# EAGLE board Qwiic-OpenLog-Panel (EAGLE 9.3.2), part 1 of 2
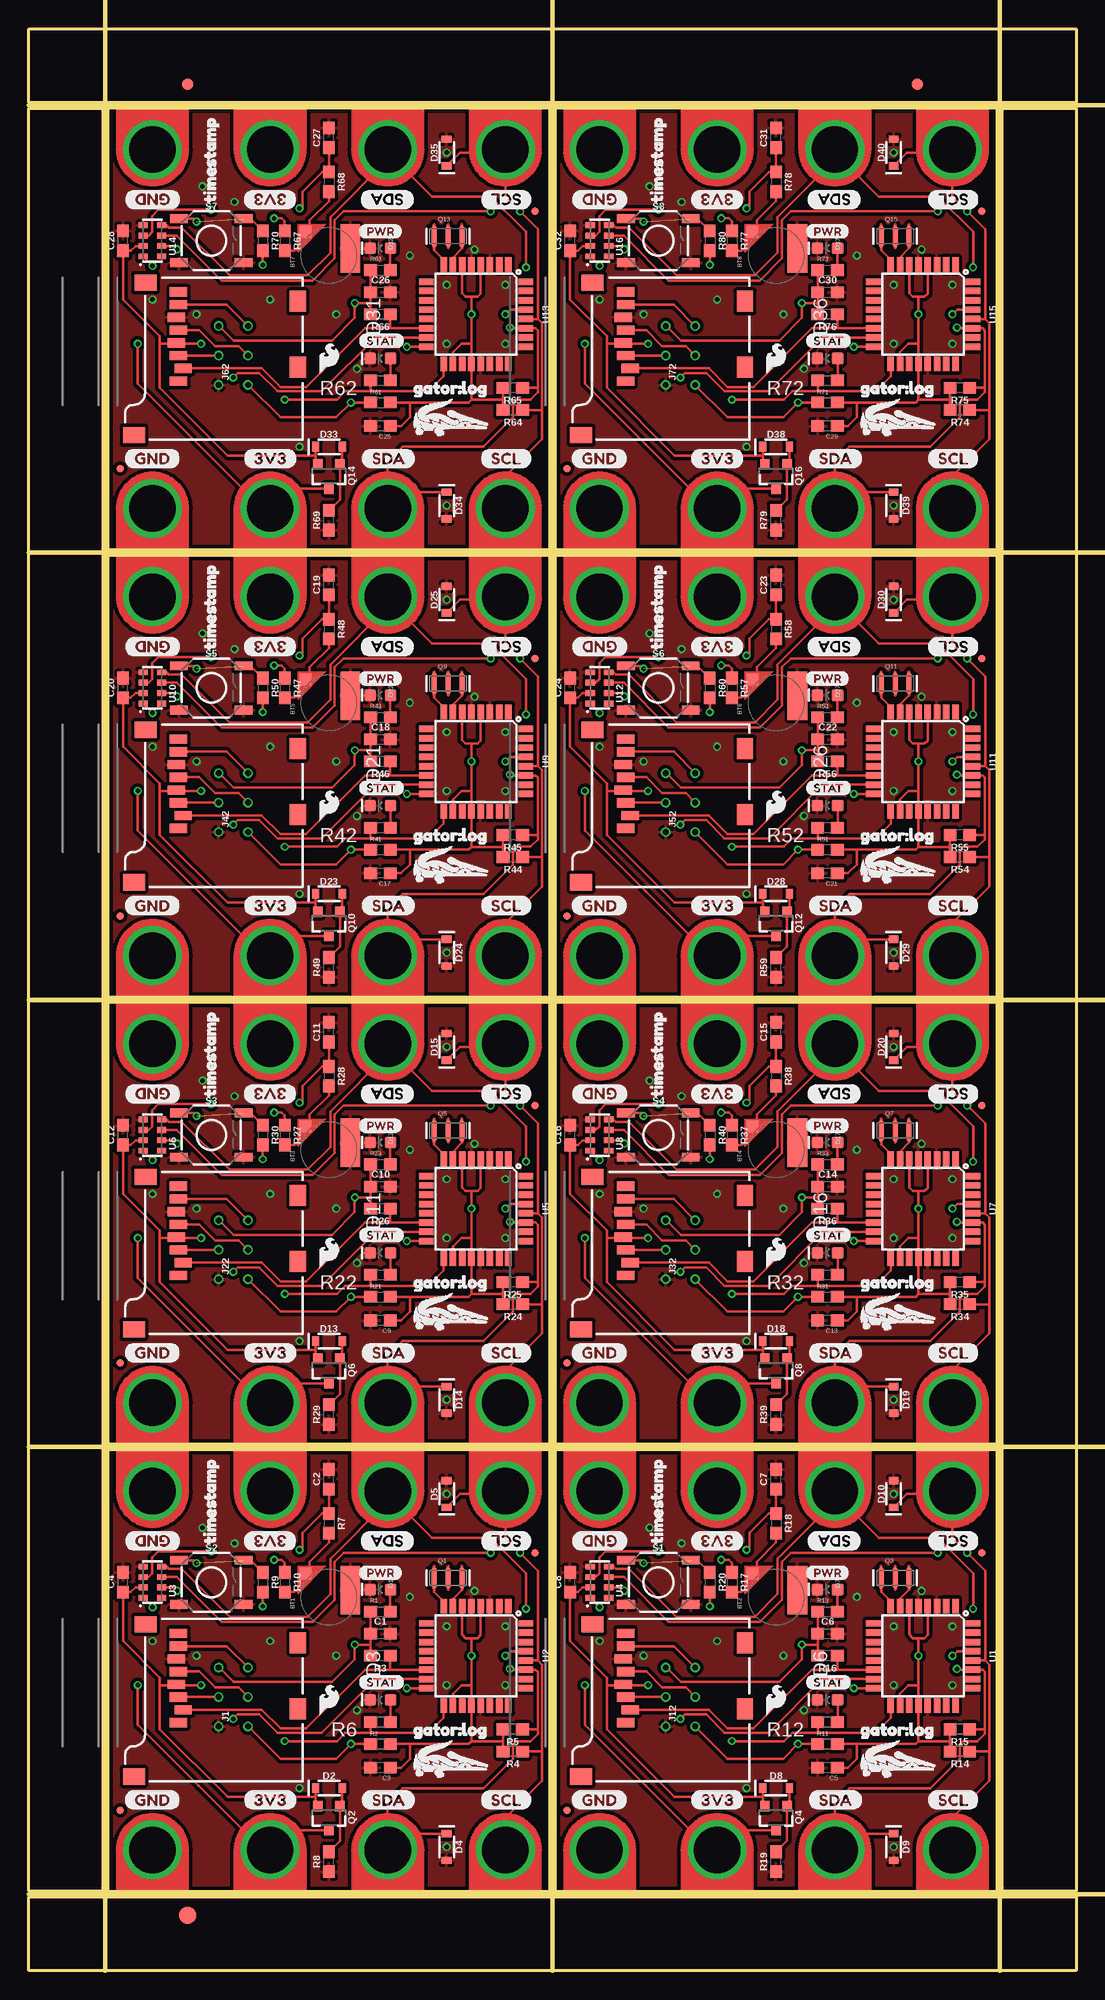
[diagram p0: board, top side]
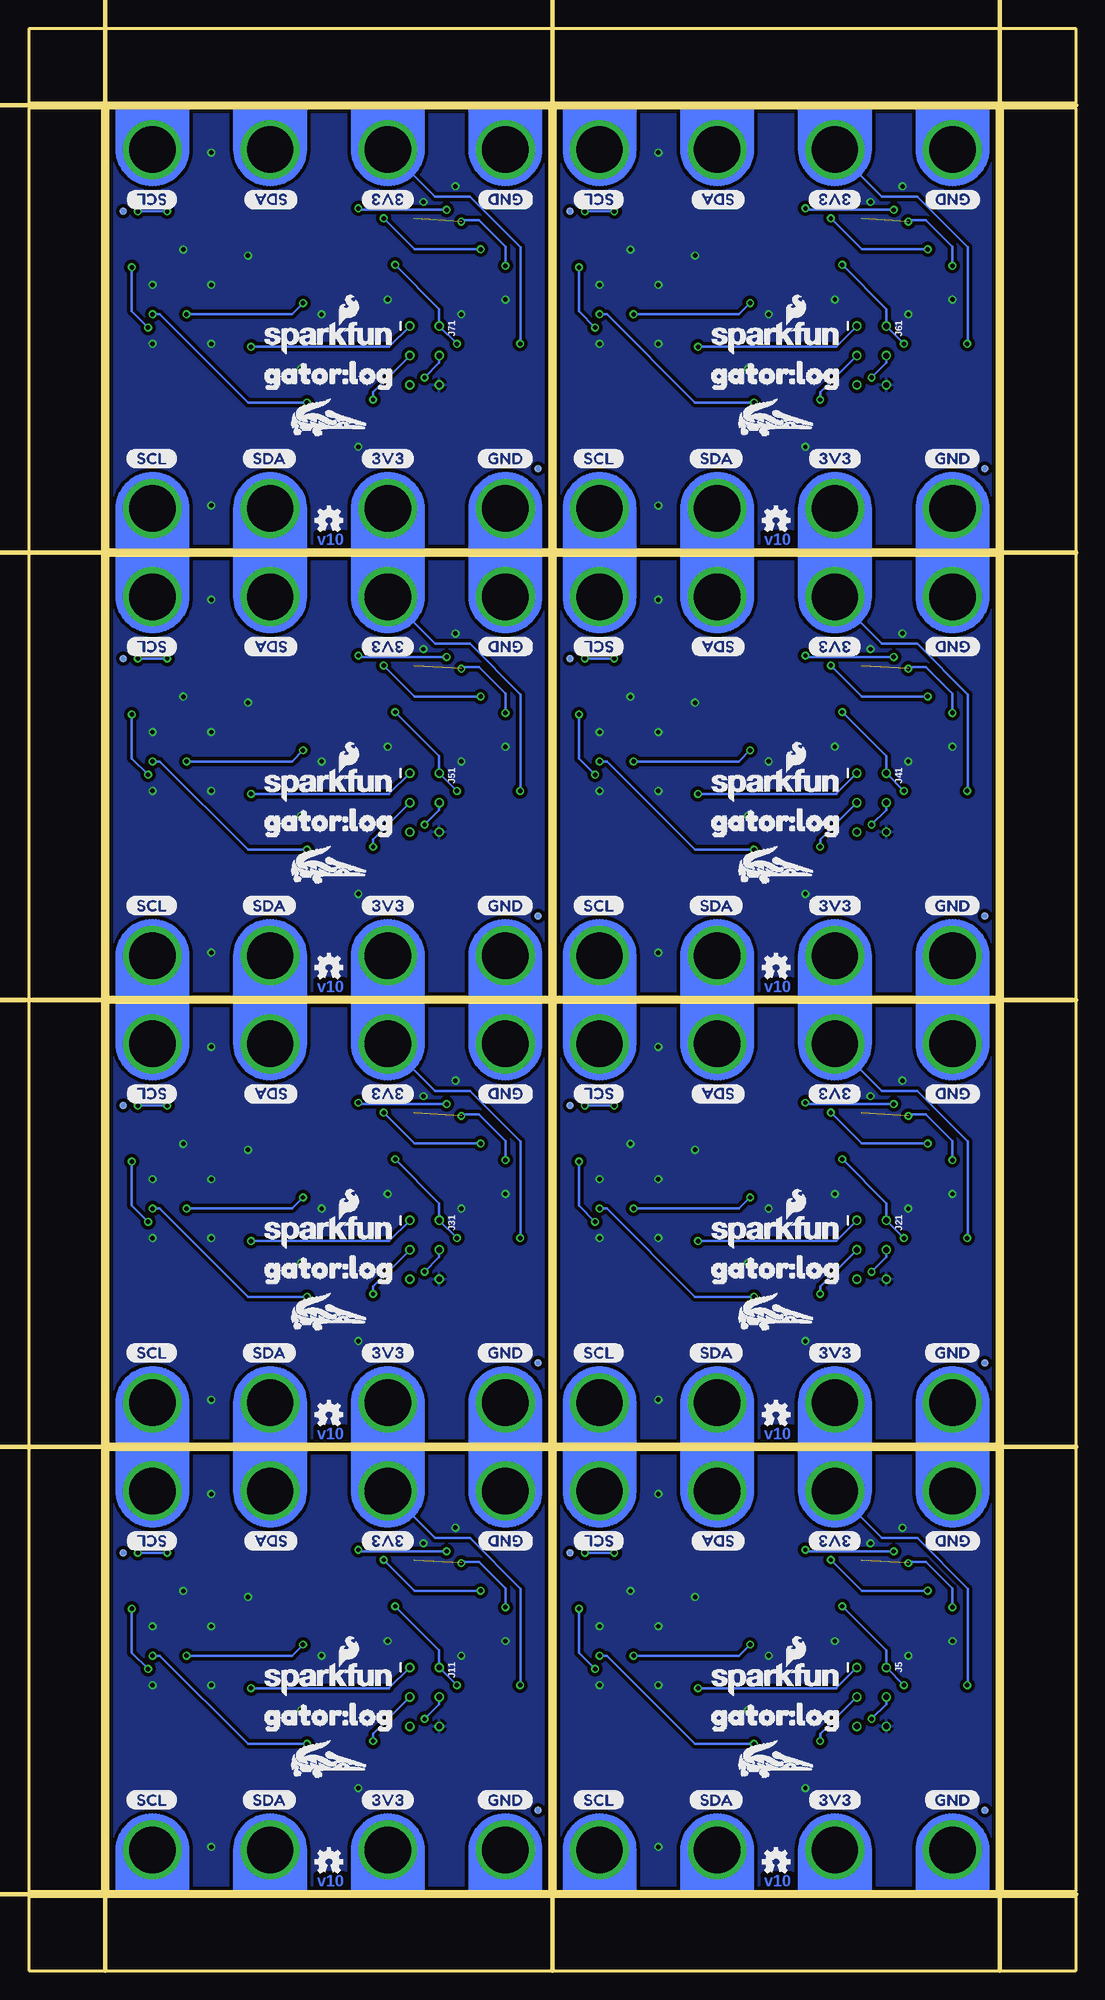
[diagram p1: board, bottom side, seen from below]

Size 90.42 x 167.64 mm. Coordinates in mm from the lower left corner, seen from the top.
Outline: 44.96,6.86 44.96,44.96 6.86,44.96 6.86,6.86 44.96,6.86
Outline: 83.57,6.86 83.57,44.96 45.47,44.96 45.47,6.86 83.57,6.86
Outline: 44.96,45.47 44.96,83.57 6.86,83.57 6.86,45.47 44.96,45.47
Outline: 83.57,45.47 83.57,83.57 45.47,83.57 45.47,45.47 83.57,45.47
Outline: 44.96,84.07 44.96,122.17 6.86,122.17 6.86,84.07 44.96,84.07
Outline: 83.57,84.07 83.57,122.17 45.47,122.17 45.47,84.07 83.57,84.07
Outline: 44.96,122.68 44.96,160.78 6.86,160.78 6.86,122.68 44.96,122.68
Outline: 83.57,122.68 83.57,160.78 45.47,160.78 45.47,122.68 83.57,122.68
Outline: 0,6.35 90.42,6.35 90.42,0 0,0 0,6.35
Outline: 84.07,160.78 90.42,160.78 90.42,6.86 84.07,6.86 84.07,160.78
Outline: 0,167.64 90.42,167.64 90.42,161.29 0,161.29 0,167.64
Outline: 0,160.78 6.35,160.78 6.35,6.86 0,6.86 0,160.78
Copper layers (1*16): Top 0.035mm / dielectric 1.5mm / Bottom 0.035mm
Design rules "SparkFun-2-layer-PCBWay-LIMIT": minimum track width 6mil, minimum drill 0.3mm, track to track 6mil, track to pad 6mil, pad to pad 6mil, via to via 6mil, smd to smd 6mil, copper to edge 6mil, drill to drill 6mil, minimum pad ring 6mil, minimum via ring 6mil, stop-mask expansion 4mil, vias tented up to drill 25mil, thermal gap 10mil
Net classes: 1 vcc: width 0.152 mm
Milling: 8 lines

## Footprints (pad centres in the part's own frame; a part is rotated, then mirrored left to right if it is on the bottom)
ML414H_IV01E = smd 1 x 1: + 2.022,2.032 | smd 4.2 x 1.7: - 0.6,-1.85
0603 = smd 1.1 x 1: 1 -0.85,0; 2 0.85,0
LED-0603 = smd 1 x 1: A -0.877,0; C 0.877,0
SOD-323 = smd 0.63 x 0.83: A 1.15,0; C -1.15,0
FIDUCIAL-1X2 = smd 1 x 1: 1 0,0
FIDUCIAL-1.5X3 = smd 1.5 x 1.5: 1 0,0
FIDUCIAL-MICRO = smd 0.635 x 0.635: 1 0,0
MICRO-SD-SOCKET = smd 1.8 x 1.4: CD1 -2.05,0.4; CD2 -7.75,0.4 | smd 0.8 x 1.5: CS -7.84,10.3; DI -6.74,10.7; DO -2.34,10.7; GND -3.44,10.9; RSV1 -8.94,10.7; RSV2 -1.24,10.7; SCLK -4.54,10.7; VCC -5.64,10.9 | smd 1.4 x 1.9: GND1 -13.6,14.55; GND3 -0.45,13.55
GATOR_MINI = drill 4 pad 5.08: P$2 0,-0.254
2X3_TEST_POINTS = drill 0.508: 1 -2.54,-1.27; 2 -2.54,1.27; 3 0,-1.27; 4 0,1.27; 5 2.54,-1.27; 6 2.54,1.27
RESONATOR-SMD = smd 0.45 x 1.905: 1 -1.2,0; 2 0,0; 3 1.2,0
SOT23-3 = smd 0.8 x 0.9: 1 -0.95,-1; 2 0.95,-1; 3 0,1.1
TACTILE_SWITCH_SMD_5.2MM = smd 1.524 x 0.762: 1 -2.794,1.905; 2 2.794,1.905; 3 -2.794,-1.905; 4 2.794,-1.905
TQFP32-08 = smd 1.27 x 0.559: 1 -4.293,2.8; 2 -4.293,2; 3 -4.293,1.2; 4 -4.293,0.4; 5 -4.293,-0.4; 6 -4.293,-1.2; 7 -4.293,-2; 8 -4.293,-2.8; 17 4.293,-2.8; 18 4.293,-2; 19 4.293,-1.2; 20 4.293,-0.4; 21 4.293,0.4; 22 4.293,1.2; 23 4.293,2; 24 4.293,2.8 | smd 0.559 x 1.27: 9 -2.8,-4.293; 10 -2,-4.293; 11 -1.2,-4.293; 12 -0.4,-4.293; 13 0.4,-4.293; 14 1.2,-4.293; 15 2,-4.293; 16 2.8,-4.293; 25 2.8,4.293; 26 2,4.293; 27 1.2,4.293; 28 0.4,4.293; 29 -0.4,4.293; 30 -1.2,4.293; 31 -2,4.293; 32 -2.8,4.293
RV-3028 = smd 0.5 x 0.8: 1 -1.35,-0.8; 2 -0.45,-0.8; 3 0.45,-0.8; 4 1.35,-0.8; 5 1.35,0.8; 6 0.45,0.8; 7 -0.45,0.8; 8 -1.35,0.8

## Placement (x,y rotation side)
BT1  ML414H_IV01E_BATTERY  [ML414H_IV01E]  25.91,32.26 90 top
BT2  ML414H_IV01E_BATTERY  [ML414H_IV01E]  64.52,32.26 90 top
BT3  ML414H_IV01E_BATTERY  [ML414H_IV01E]  25.91,70.87 90 top
BT4  ML414H_IV01E_BATTERY  [ML414H_IV01E]  64.52,70.87 90 top
BT5  ML414H_IV01E_BATTERY  [ML414H_IV01E]  25.91,109.47 90 top
BT6  ML414H_IV01E_BATTERY  [ML414H_IV01E]  64.52,109.47 90 top
BT7  ML414H_IV01E_BATTERY  [ML414H_IV01E]  25.91,148.08 90 top
BT8  ML414H_IV01E_BATTERY  [ML414H_IV01E]  64.52,148.08 90 top
C1  4.7uF  [0603]  30.35,29.08 0 top
C2  0.1uF  [0603]  25.91,42.42 90 top
C3  0.1uF  [0603]  30.35,17.53 180 top
C4  0.1uF  [0603]  8.13,33.53 90 top
C5  0.1uF  [0603]  68.96,17.53 180 top
C6  4.7uF  [0603]  68.96,29.08 0 top
C7  0.1uF  [0603]  64.52,42.42 90 top
C8  0.1uF  [0603]  46.74,33.53 90 top
C9  0.1uF  [0603]  30.35,56.13 180 top
C10  4.7uF  [0603]  30.35,67.69 0 top
C11  0.1uF  [0603]  25.91,81.03 90 top
C12  0.1uF  [0603]  8.13,72.14 90 top
C13  0.1uF  [0603]  68.96,56.13 180 top
C14  4.7uF  [0603]  68.96,67.69 0 top
C15  0.1uF  [0603]  64.52,81.03 90 top
C16  0.1uF  [0603]  46.74,72.14 90 top
C17  0.1uF  [0603]  30.35,94.74 180 top
C18  4.7uF  [0603]  30.35,106.3 0 top
C19  0.1uF  [0603]  25.91,119.63 90 top
C20  0.1uF  [0603]  8.13,110.74 90 top
C21  0.1uF  [0603]  68.96,94.74 180 top
C22  4.7uF  [0603]  68.96,106.3 0 top
C23  0.1uF  [0603]  64.52,119.63 90 top
C24  0.1uF  [0603]  46.74,110.74 90 top
C25  0.1uF  [0603]  30.35,133.35 180 top
C26  4.7uF  [0603]  30.35,144.91 0 top
C27  0.1uF  [0603]  25.91,158.24 90 top
C28  0.1uF  [0603]  8.13,149.35 90 top
C29  0.1uF  [0603]  68.96,133.35 180 top
C30  4.7uF  [0603]  68.96,144.91 0 top
C31  0.1uF  [0603]  64.52,158.24 90 top
C32  0.1uF  [0603]  46.74,149.35 90 top
D1  RED  [LED-0603]  30.35,32.89 180 top
D2  3.6V  [SOD-323]  25.91,15.75 0 top
D3  GREEN  [LED-0603]  30.35,23.37 180 top
D4  3.6V  [SOD-323]  36.07,10.67 270 top
D5  3.6V  [SOD-323]  36.07,41.15 90 top
D6  GREEN  [LED-0603]  68.96,23.37 180 top
D7  RED  [LED-0603]  68.96,32.89 180 top
D8  3.6V  [SOD-323]  64.52,15.75 0 top
D9  3.6V  [SOD-323]  74.68,10.67 270 top
D10  3.6V  [SOD-323]  74.68,41.15 90 top
D11  GREEN  [LED-0603]  30.35,61.98 180 top
D12  RED  [LED-0603]  30.35,71.5 180 top
D13  3.6V  [SOD-323]  25.91,54.36 0 top
D14  3.6V  [SOD-323]  36.07,49.28 270 top
D15  3.6V  [SOD-323]  36.07,79.76 90 top
D16  GREEN  [LED-0603]  68.96,61.98 180 top
D17  RED  [LED-0603]  68.96,71.5 180 top
D18  3.6V  [SOD-323]  64.52,54.36 0 top
D19  3.6V  [SOD-323]  74.68,49.28 270 top
D20  3.6V  [SOD-323]  74.68,79.76 90 top
D21  GREEN  [LED-0603]  30.35,100.58 180 top
D22  RED  [LED-0603]  30.35,110.11 180 top
D23  3.6V  [SOD-323]  25.91,92.96 0 top
D24  3.6V  [SOD-323]  36.07,87.88 270 top
D25  3.6V  [SOD-323]  36.07,118.36 90 top
D26  GREEN  [LED-0603]  68.96,100.58 180 top
D27  RED  [LED-0603]  68.96,110.11 180 top
D28  3.6V  [SOD-323]  64.52,92.96 0 top
D29  3.6V  [SOD-323]  74.68,87.88 270 top
D30  3.6V  [SOD-323]  74.68,118.36 90 top
D31  GREEN  [LED-0603]  30.35,139.19 180 top
D32  RED  [LED-0603]  30.35,148.72 180 top
D33  3.6V  [SOD-323]  25.91,131.57 0 top
D34  3.6V  [SOD-323]  36.07,126.49 270 top
D35  3.6V  [SOD-323]  36.07,156.97 90 top
D36  GREEN  [LED-0603]  68.96,139.19 180 top
D37  RED  [LED-0603]  68.96,148.72 180 top
D38  3.6V  [SOD-323]  64.52,131.57 0 top
D39  3.6V  [SOD-323]  74.68,126.49 270 top
D40  3.6V  [SOD-323]  74.68,156.97 90 top
E$1  [FIDUCIAL-1X2]  13.72,162.88 0 top
E$2  [FIDUCIAL-1X2]  76.71,162.88 0 top
E$3  [FIDUCIAL-1.5X3]  13.72,4.76 0 top
FID1  FIDUCIALUFIDUCIAL  [FIDUCIAL-MICRO]  43.69,36.07 0 top
FID2  FIDUCIALUFIDUCIAL  [FIDUCIAL-MICRO]  7.87,13.84 0 top
FID3  FIDUCIALUFIDUCIAL  [FIDUCIAL-MICRO]  7.87,13.84 180 bottom
FID4  FIDUCIALUFIDUCIAL  [FIDUCIAL-MICRO]  43.69,36.07 0 bottom
FID5  FIDUCIALUFIDUCIAL  [FIDUCIAL-MICRO]  82.3,36.07 0 top
FID6  FIDUCIALUFIDUCIAL  [FIDUCIAL-MICRO]  46.48,13.84 0 top
FID7  FIDUCIALUFIDUCIAL  [FIDUCIAL-MICRO]  46.48,13.84 180 bottom
FID8  FIDUCIALUFIDUCIAL  [FIDUCIAL-MICRO]  82.3,36.07 0 bottom
FID9  FIDUCIALUFIDUCIAL  [FIDUCIAL-MICRO]  43.69,74.68 0 top
FID10  FIDUCIALUFIDUCIAL  [FIDUCIAL-MICRO]  7.87,52.45 0 top
FID11  FIDUCIALUFIDUCIAL  [FIDUCIAL-MICRO]  7.87,52.45 180 bottom
FID12  FIDUCIALUFIDUCIAL  [FIDUCIAL-MICRO]  43.69,74.68 0 bottom
FID13  FIDUCIALUFIDUCIAL  [FIDUCIAL-MICRO]  82.3,74.68 0 top
FID14  FIDUCIALUFIDUCIAL  [FIDUCIAL-MICRO]  46.48,52.45 0 top
FID15  FIDUCIALUFIDUCIAL  [FIDUCIAL-MICRO]  46.48,52.45 180 bottom
FID16  FIDUCIALUFIDUCIAL  [FIDUCIAL-MICRO]  82.3,74.68 0 bottom
FID17  FIDUCIALUFIDUCIAL  [FIDUCIAL-MICRO]  43.69,113.28 0 top
FID18  FIDUCIALUFIDUCIAL  [FIDUCIAL-MICRO]  7.87,91.06 0 top
FID19  FIDUCIALUFIDUCIAL  [FIDUCIAL-MICRO]  7.87,91.06 180 bottom
FID20  FIDUCIALUFIDUCIAL  [FIDUCIAL-MICRO]  43.69,113.28 0 bottom
FID21  FIDUCIALUFIDUCIAL  [FIDUCIAL-MICRO]  82.3,113.28 0 top
FID22  FIDUCIALUFIDUCIAL  [FIDUCIAL-MICRO]  46.48,91.06 0 top
FID23  FIDUCIALUFIDUCIAL  [FIDUCIAL-MICRO]  46.48,91.06 180 bottom
FID24  FIDUCIALUFIDUCIAL  [FIDUCIAL-MICRO]  82.3,113.28 0 bottom
FID25  FIDUCIALUFIDUCIAL  [FIDUCIAL-MICRO]  43.69,151.89 0 top
FID26  FIDUCIALUFIDUCIAL  [FIDUCIAL-MICRO]  7.87,129.67 0 top
FID27  FIDUCIALUFIDUCIAL  [FIDUCIAL-MICRO]  7.87,129.67 180 bottom
FID28  FIDUCIALUFIDUCIAL  [FIDUCIAL-MICRO]  43.69,151.89 0 bottom
FID29  FIDUCIALUFIDUCIAL  [FIDUCIAL-MICRO]  82.3,151.89 0 top
FID30  FIDUCIALUFIDUCIAL  [FIDUCIAL-MICRO]  46.48,129.67 0 top
FID31  FIDUCIALUFIDUCIAL  [FIDUCIAL-MICRO]  46.48,129.67 180 bottom
FID32  FIDUCIALUFIDUCIAL  [FIDUCIAL-MICRO]  82.3,151.89 0 bottom
J1  MICRO-SD  [MICRO-SD-SOCKET]  23.62,30.35 90 top
J2  GATORGATOR_MINI  [GATOR_MINI]  41.15,41.15 180 top
J3  GATORGATOR_MINI  [GATOR_MINI]  30.99,41.15 180 top
J4  GATORGATOR_MINI  [GATOR_MINI]  20.83,41.15 180 top
J5  ISP  [2X3_TEST_POINTS]  17.65,23.62 270 bottom
J6  GATORGATOR_MINI  [GATOR_MINI]  10.67,41.15 180 top
J7  GATORGATOR_MINI  [GATOR_MINI]  41.15,10.67 0 top
J8  GATORGATOR_MINI  [GATOR_MINI]  30.99,10.67 0 top
J9  GATORGATOR_MINI  [GATOR_MINI]  20.83,10.67 0 top
J10  GATORGATOR_MINI  [GATOR_MINI]  10.67,10.67 0 top
J11  ISP  [2X3_TEST_POINTS]  56.26,23.62 270 bottom
J12  MICRO-SD  [MICRO-SD-SOCKET]  62.23,30.35 90 top
J13  GATORGATOR_MINI  [GATOR_MINI]  79.76,10.67 0 top
J14  GATORGATOR_MINI  [GATOR_MINI]  69.6,10.67 0 top
J15  GATORGATOR_MINI  [GATOR_MINI]  59.44,10.67 0 top
J16  GATORGATOR_MINI  [GATOR_MINI]  49.28,10.67 0 top
J17  GATORGATOR_MINI  [GATOR_MINI]  79.76,41.15 180 top
J18  GATORGATOR_MINI  [GATOR_MINI]  69.6,41.15 180 top
J19  GATORGATOR_MINI  [GATOR_MINI]  59.44,41.15 180 top
J20  GATORGATOR_MINI  [GATOR_MINI]  49.28,41.15 180 top
J21  ISP  [2X3_TEST_POINTS]  17.65,62.23 270 bottom
J22  MICRO-SD  [MICRO-SD-SOCKET]  23.62,68.96 90 top
J23  GATORGATOR_MINI  [GATOR_MINI]  41.15,49.28 0 top
J24  GATORGATOR_MINI  [GATOR_MINI]  30.99,49.28 0 top
J25  GATORGATOR_MINI  [GATOR_MINI]  20.83,49.28 0 top
J26  GATORGATOR_MINI  [GATOR_MINI]  10.67,49.28 0 top
J27  GATORGATOR_MINI  [GATOR_MINI]  41.15,79.76 180 top
J28  GATORGATOR_MINI  [GATOR_MINI]  30.99,79.76 180 top
J29  GATORGATOR_MINI  [GATOR_MINI]  20.83,79.76 180 top
J30  GATORGATOR_MINI  [GATOR_MINI]  10.67,79.76 180 top
J31  ISP  [2X3_TEST_POINTS]  56.26,62.23 270 bottom
J32  MICRO-SD  [MICRO-SD-SOCKET]  62.23,68.96 90 top
J33  GATORGATOR_MINI  [GATOR_MINI]  79.76,49.28 0 top
J34  GATORGATOR_MINI  [GATOR_MINI]  69.6,49.28 0 top
J35  GATORGATOR_MINI  [GATOR_MINI]  59.44,49.28 0 top
J36  GATORGATOR_MINI  [GATOR_MINI]  49.28,49.28 0 top
J37  GATORGATOR_MINI  [GATOR_MINI]  79.76,79.76 180 top
J38  GATORGATOR_MINI  [GATOR_MINI]  69.6,79.76 180 top
J39  GATORGATOR_MINI  [GATOR_MINI]  59.44,79.76 180 top
J40  GATORGATOR_MINI  [GATOR_MINI]  49.28,79.76 180 top
J41  ISP  [2X3_TEST_POINTS]  17.65,100.84 270 bottom
J42  MICRO-SD  [MICRO-SD-SOCKET]  23.62,107.57 90 top
J43  GATORGATOR_MINI  [GATOR_MINI]  41.15,87.88 0 top
J44  GATORGATOR_MINI  [GATOR_MINI]  30.99,87.88 0 top
J45  GATORGATOR_MINI  [GATOR_MINI]  20.83,87.88 0 top
J46  GATORGATOR_MINI  [GATOR_MINI]  10.67,87.88 0 top
J47  GATORGATOR_MINI  [GATOR_MINI]  41.15,118.36 180 top
J48  GATORGATOR_MINI  [GATOR_MINI]  30.99,118.36 180 top
J49  GATORGATOR_MINI  [GATOR_MINI]  20.83,118.36 180 top
J50  GATORGATOR_MINI  [GATOR_MINI]  10.67,118.36 180 top
J51  ISP  [2X3_TEST_POINTS]  56.26,100.84 270 bottom
J52  MICRO-SD  [MICRO-SD-SOCKET]  62.23,107.57 90 top
J53  GATORGATOR_MINI  [GATOR_MINI]  79.76,87.88 0 top
J54  GATORGATOR_MINI  [GATOR_MINI]  69.6,87.88 0 top
J55  GATORGATOR_MINI  [GATOR_MINI]  59.44,87.88 0 top
J56  GATORGATOR_MINI  [GATOR_MINI]  49.28,87.88 0 top
J57  GATORGATOR_MINI  [GATOR_MINI]  79.76,118.36 180 top
J58  GATORGATOR_MINI  [GATOR_MINI]  69.6,118.36 180 top
J59  GATORGATOR_MINI  [GATOR_MINI]  59.44,118.36 180 top
J60  GATORGATOR_MINI  [GATOR_MINI]  49.28,118.36 180 top
J61  ISP  [2X3_TEST_POINTS]  17.65,139.45 270 bottom
J62  MICRO-SD  [MICRO-SD-SOCKET]  23.62,146.18 90 top
J63  GATORGATOR_MINI  [GATOR_MINI]  41.15,126.49 0 top
J64  GATORGATOR_MINI  [GATOR_MINI]  30.99,126.49 0 top
J65  GATORGATOR_MINI  [GATOR_MINI]  20.83,126.49 0 top
J66  GATORGATOR_MINI  [GATOR_MINI]  10.67,126.49 0 top
J67  GATORGATOR_MINI  [GATOR_MINI]  41.15,156.97 180 top
J68  GATORGATOR_MINI  [GATOR_MINI]  30.99,156.97 180 top
J69  GATORGATOR_MINI  [GATOR_MINI]  20.83,156.97 180 top
J70  GATORGATOR_MINI  [GATOR_MINI]  10.67,156.97 180 top
J71  ISP  [2X3_TEST_POINTS]  56.26,139.45 270 bottom
J72  MICRO-SD  [MICRO-SD-SOCKET]  62.23,146.18 90 top
J73  GATORGATOR_MINI  [GATOR_MINI]  79.76,126.49 0 top
J74  GATORGATOR_MINI  [GATOR_MINI]  69.6,126.49 0 top
J75  GATORGATOR_MINI  [GATOR_MINI]  59.44,126.49 0 top
J76  GATORGATOR_MINI  [GATOR_MINI]  49.28,126.49 0 top
J77  GATORGATOR_MINI  [GATOR_MINI]  79.76,156.97 180 top
J78  GATORGATOR_MINI  [GATOR_MINI]  69.6,156.97 180 top
J79  GATORGATOR_MINI  [GATOR_MINI]  59.44,156.97 180 top
J80  GATORGATOR_MINI  [GATOR_MINI]  49.28,156.97 180 top
LOGO1  SFE_LOGO_FLAME.1_INCH  [SFE_LOGO_FLAME_.1]  25.91,23.37 0 top
LOGO2  OSHW-LOGOMINI  [OSHW-LOGO-MINI]  25.91,9.4 0 bottom
LOGO3  OSHW-LOGOMINI  [OSHW-LOGO-MINI]  64.52,9.4 0 bottom
LOGO4  SFE_LOGO_NAME_FLAME.1_INCH  [SFE_LOGO_NAME_FLAME_.1]  25.91,25.15 0 bottom
LOGO5  SFE_LOGO_NAME_FLAME.1_INCH  [SFE_LOGO_NAME_FLAME_.1]  64.52,25.15 0 bottom
LOGO6  SFE_LOGO_FLAME.1_INCH  [SFE_LOGO_FLAME_.1]  64.52,23.37 0 top
LOGO7  OSHW-LOGOMINI  [OSHW-LOGO-MINI]  25.91,48.01 0 bottom
LOGO8  SFE_LOGO_NAME_FLAME.1_INCH  [SFE_LOGO_NAME_FLAME_.1]  25.91,63.75 0 bottom
LOGO9  SFE_LOGO_FLAME.1_INCH  [SFE_LOGO_FLAME_.1]  25.91,61.98 0 top
LOGO10  OSHW-LOGOMINI  [OSHW-LOGO-MINI]  64.52,48.01 0 bottom
LOGO11  SFE_LOGO_NAME_FLAME.1_INCH  [SFE_LOGO_NAME_FLAME_.1]  64.52,63.75 0 bottom
LOGO12  SFE_LOGO_FLAME.1_INCH  [SFE_LOGO_FLAME_.1]  64.52,61.98 0 top
LOGO13  OSHW-LOGOMINI  [OSHW-LOGO-MINI]  25.91,86.61 0 bottom
LOGO14  SFE_LOGO_NAME_FLAME.1_INCH  [SFE_LOGO_NAME_FLAME_.1]  25.91,102.36 0 bottom
LOGO15  SFE_LOGO_FLAME.1_INCH  [SFE_LOGO_FLAME_.1]  25.91,100.58 0 top
LOGO16  OSHW-LOGOMINI  [OSHW-LOGO-MINI]  64.52,86.61 0 bottom
LOGO17  SFE_LOGO_NAME_FLAME.1_INCH  [SFE_LOGO_NAME_FLAME_.1]  64.52,102.36 0 bottom
LOGO18  SFE_LOGO_FLAME.1_INCH  [SFE_LOGO_FLAME_.1]  64.52,100.58 0 top
LOGO19  OSHW-LOGOMINI  [OSHW-LOGO-MINI]  25.91,125.22 0 bottom
LOGO20  SFE_LOGO_NAME_FLAME.1_INCH  [SFE_LOGO_NAME_FLAME_.1]  25.91,140.97 0 bottom
LOGO21  SFE_LOGO_FLAME.1_INCH  [SFE_LOGO_FLAME_.1]  25.91,139.19 0 top
LOGO22  OSHW-LOGOMINI  [OSHW-LOGO-MINI]  64.52,125.22 0 bottom
LOGO23  SFE_LOGO_NAME_FLAME.1_INCH  [SFE_LOGO_NAME_FLAME_.1]  64.52,140.97 0 bottom
LOGO24  SFE_LOGO_FLAME.1_INCH  [SFE_LOGO_FLAME_.1]  64.52,139.19 0 top
Q1  16MHZ  [RESONATOR-SMD]  36.2,33.91 0 top
Q2  2.5A/30V/105mΩ  [SOT23-3]  25.91,13.21 180 top
Q3  16MHZ  [RESONATOR-SMD]  74.8,33.91 0 top
Q4  2.5A/30V/105mΩ  [SOT23-3]  64.52,13.21 180 top
Q5  16MHZ  [RESONATOR-SMD]  36.2,72.52 0 top
Q6  2.5A/30V/105mΩ  [SOT23-3]  25.91,51.82 180 top
Q7  16MHZ  [RESONATOR-SMD]  74.8,72.52 0 top
Q8  2.5A/30V/105mΩ  [SOT23-3]  64.52,51.82 180 top
Q9  16MHZ  [RESONATOR-SMD]  36.2,111.12 0 top
Q10  2.5A/30V/105mΩ  [SOT23-3]  25.91,90.42 180 top
Q11  16MHZ  [RESONATOR-SMD]  74.8,111.12 0 top
Q12  2.5A/30V/105mΩ  [SOT23-3]  64.52,90.42 180 top
Q13  16MHZ  [RESONATOR-SMD]  36.2,149.73 0 top
Q14  2.5A/30V/105mΩ  [SOT23-3]  25.91,129.03 180 top
Q15  16MHZ  [RESONATOR-SMD]  74.8,149.73 0 top
Q16  2.5A/30V/105mΩ  [SOT23-3]  64.52,129.03 180 top
R1  1k  [0603]  30.35,30.99 0 top
R2  10k  [0603]  30.35,19.56 0 top
R3  10k  [0603]  30.35,27.18 180 top
R4  10k  [0603]  41.78,18.92 180 top
R5  10k  [0603]  41.78,20.83 180 top
R6  330  [0603]  30.35,21.46 0 top
R7  470  [0603]  25.91,38.61 270 top
R8  10k  [0603]  25.91,9.4 90 top
R9  10k  [0603]  20.19,33.53 270 top
R10  10k  [0603]  22.1,33.53 270 top
R11  10k  [0603]  68.96,19.56 0 top
R12  330  [0603]  68.96,21.46 0 top
R13  1k  [0603]  68.96,30.99 0 top
R14  10k  [0603]  80.39,18.92 180 top
R15  10k  [0603]  80.39,20.83 180 top
R16  10k  [0603]  68.96,27.18 180 top
R17  10k  [0603]  60.71,33.53 270 top
R18  470  [0603]  64.52,38.61 270 top
R19  10k  [0603]  64.52,9.4 90 top
R20  10k  [0603]  58.8,33.53 270 top
R21  10k  [0603]  30.35,58.17 0 top
R22  330  [0603]  30.35,60.07 0 top
R23  1k  [0603]  30.35,69.6 0 top
R24  10k  [0603]  41.78,57.53 180 top
R25  10k  [0603]  41.78,59.44 180 top
R26  10k  [0603]  30.35,65.79 180 top
R27  10k  [0603]  22.1,72.14 270 top
R28  470  [0603]  25.91,77.22 270 top
R29  10k  [0603]  25.91,48.01 90 top
R30  10k  [0603]  20.19,72.14 270 top
R31  10k  [0603]  68.96,58.17 0 top
R32  330  [0603]  68.96,60.07 0 top
R33  1k  [0603]  68.96,69.6 0 top
R34  10k  [0603]  80.39,57.53 180 top
R35  10k  [0603]  80.39,59.44 180 top
R36  10k  [0603]  68.96,65.79 180 top
R37  10k  [0603]  60.71,72.14 270 top
R38  470  [0603]  64.52,77.22 270 top
R39  10k  [0603]  64.52,48.01 90 top
R40  10k  [0603]  58.8,72.14 270 top
R41  10k  [0603]  30.35,96.77 0 top
R42  330  [0603]  30.35,98.68 0 top
R43  1k  [0603]  30.35,108.2 0 top
R44  10k  [0603]  41.78,96.14 180 top
R45  10k  [0603]  41.78,98.04 180 top
R46  10k  [0603]  30.35,104.39 180 top
R47  10k  [0603]  22.1,110.74 270 top
R48  470  [0603]  25.91,115.82 270 top
R49  10k  [0603]  25.91,86.61 90 top
R50  10k  [0603]  20.19,110.74 270 top
R51  10k  [0603]  68.96,96.77 0 top
R52  330  [0603]  68.96,98.68 0 top
R53  1k  [0603]  68.96,108.2 0 top
R54  10k  [0603]  80.39,96.14 180 top
R55  10k  [0603]  80.39,98.04 180 top
R56  10k  [0603]  68.96,104.39 180 top
R57  10k  [0603]  60.71,110.74 270 top
R58  470  [0603]  64.52,115.82 270 top
R59  10k  [0603]  64.52,86.61 90 top
R60  10k  [0603]  58.8,110.74 270 top
R61  10k  [0603]  30.35,135.38 0 top
R62  330  [0603]  30.35,137.29 0 top
R63  1k  [0603]  30.35,146.81 0 top
R64  10k  [0603]  41.78,134.75 180 top
R65  10k  [0603]  41.78,136.65 180 top
R66  10k  [0603]  30.35,143 180 top
R67  10k  [0603]  22.1,149.35 270 top
R68  470  [0603]  25.91,154.43 270 top
R69  10k  [0603]  25.91,125.22 90 top
R70  10k  [0603]  20.19,149.35 270 top
R71  10k  [0603]  68.96,135.38 0 top
R72  330  [0603]  68.96,137.29 0 top
R73  1k  [0603]  68.96,146.81 0 top
R74  10k  [0603]  80.39,134.75 180 top
R75  10k  [0603]  80.39,136.65 180 top
R76  10k  [0603]  68.96,143 180 top
R77  10k  [0603]  60.71,149.35 270 top
R78  470  [0603]  64.52,154.43 270 top
R79  10k  [0603]  64.52,125.22 90 top
R80  10k  [0603]  58.8,149.35 270 top
S1  [TACTILE_SWITCH_SMD_5.2MM]  54.36,33.53 0 top
S2  [TACTILE_SWITCH_SMD_5.2MM]  15.75,33.53 0 top
S3  [TACTILE_SWITCH_SMD_5.2MM]  15.75,72.14 0 top
S4  [TACTILE_SWITCH_SMD_5.2MM]  54.36,72.14 0 top
S5  [TACTILE_SWITCH_SMD_5.2MM]  15.75,110.74 0 top
S6  [TACTILE_SWITCH_SMD_5.2MM]  54.36,110.74 0 top
S7  [TACTILE_SWITCH_SMD_5.2MM]  15.75,149.35 0 top
S8  [TACTILE_SWITCH_SMD_5.2MM]  54.36,149.35 0 top
U1  ATMEGA328P  [TQFP32-08]  77.22,27.18 270 top
U2  ATMEGA328P  [TQFP32-08]  38.61,27.18 270 top
U3  RV-3028  [RV-3028]  10.67,33.53 90 top
U4  RV-3028  [RV-3028]  49.28,33.53 90 top
U5  ATMEGA328P  [TQFP32-08]  38.61,65.79 270 top
U6  RV-3028  [RV-3028]  10.67,72.14 90 top
U7  ATMEGA328P  [TQFP32-08]  77.22,65.79 270 top
U8  RV-3028  [RV-3028]  49.28,72.14 90 top
U9  ATMEGA328P  [TQFP32-08]  38.61,104.39 270 top
U10  RV-3028  [RV-3028]  10.67,110.74 90 top
U11  ATMEGA328P  [TQFP32-08]  77.22,104.39 270 top
U12  RV-3028  [RV-3028]  49.28,110.74 90 top
U13  ATMEGA328P  [TQFP32-08]  38.61,143 270 top
U14  RV-3028  [RV-3028]  10.67,149.35 90 top
U15  ATMEGA328P  [TQFP32-08]  77.22,143 270 top
U16  RV-3028  [RV-3028]  49.28,149.35 90 top
U$1  [3V33]  18.49,14.73 0 top
U$2  [GND0]  8.23,14.73 0 top
U$3  [3V33]  23.16,37.08 180 top
U$4  [SDA1]  28.7,14.73 0 top
U$5  [SCL2]  38.99,14.73 0 top
U$6  [SCL2]  43.43,37.08 180 top
U$7  [SDA1]  33.27,37.08 180 top
U$8  [GATORBIT_FINAL_FOR_SILK#01#PNG]  25.91,18.29 0 bottom
U$9  [PWR-()-03]  28.47,34.34 0 top
U$10  [GND0]  13.11,37.08 180 top
U$11  [GND0]  8.23,37.08 180 bottom
U$12  [3V33]  18.49,37.08 180 bottom
U$13  [SDA1]  28.57,37.08 180 bottom
U$14  [SCL2]  38.99,37.08 180 bottom
U$15  [3V33]  23.16,14.73 0 bottom
U$16  [SDA1]  33.4,14.73 0 bottom
U$17  [STAT0]  28.45,24.89 0 top
U$18  [SCL2]  43.43,14.73 0 bottom
U$19  [TIMESTAMP0]  15.62,35.94 90 top
U$20  [GATOR#LOG3]  32.26,20.83 0 top
U$21  [GATORBIT_FINAL_FOR_SILK#01#PNG]  36.45,18.29 0 top
U$22  [PWR-()-03]  67.08,34.34 0 top
U$23  [GND0]  13.11,14.73 0 bottom
U$24  [GATOR#LOG0]  33.15,22.1 0 bottom
U$25  [STAT0]  67.06,24.89 0 top
U$26  [3V33]  57.1,14.73 0 top
U$27  [GND0]  46.84,14.73 0 top
U$28  [3V33]  61.77,37.08 180 top
U$29  [SDA1]  67.31,14.73 0 top
U$30  [SCL2]  77.6,14.73 0 top
U$31  [SCL2]  82.04,37.08 180 top
U$32  [SDA1]  71.88,37.08 180 top
U$33  [GND0]  51.71,37.08 180 top
U$34  [GND0]  46.84,37.08 180 bottom
U$35  [3V33]  57.1,37.08 180 bottom
U$36  [SDA1]  67.18,37.08 180 bottom
U$37  [SCL2]  77.6,37.08 180 bottom
U$38  [3V33]  61.77,14.73 0 bottom
U$39  [SDA1]  72.01,14.73 0 bottom
U$40  [SCL2]  82.04,14.73 0 bottom
U$41  [GATORBIT_FINAL_FOR_SILK#01#PNG]  64.52,18.29 0 bottom
U$42  [GATOR#LOG3]  70.87,20.83 0 top
U$43  [GATORBIT_FINAL_FOR_SILK#01#PNG]  75.06,18.29 0 top
U$44  [GND0]  51.71,14.73 0 bottom
U$45  [GATOR#LOG0]  71.76,22.1 0 bottom
U$46  [TIMESTAMP0]  54.23,35.94 90 top
U$47  [PWR-()-03]  28.47,72.95 0 top
U$48  [STAT0]  28.45,63.5 0 top
U$49  [3V33]  18.49,53.34 0 top
U$50  [GND0]  8.23,53.34 0 top
U$51  [3V33]  23.16,75.69 180 top
U$52  [SDA1]  28.7,53.34 0 top
U$53  [SCL2]  38.99,53.34 0 top
U$54  [SCL2]  43.43,75.69 180 top
U$55  [SDA1]  33.27,75.69 180 top
U$56  [GND0]  13.11,75.69 180 top
U$57  [GND0]  8.23,75.69 180 bottom
U$58  [3V33]  18.49,75.69 180 bottom
U$59  [SDA1]  28.57,75.69 180 bottom
U$60  [SCL2]  38.99,75.69 180 bottom
U$61  [3V33]  23.16,53.34 0 bottom
U$62  [SDA1]  33.4,53.34 0 bottom
U$63  [SCL2]  43.43,53.34 0 bottom
U$64  [GATORBIT_FINAL_FOR_SILK#01#PNG]  25.91,56.9 0 bottom
U$65  [GATOR#LOG3]  32.26,59.44 0 top
U$66  [GATORBIT_FINAL_FOR_SILK#01#PNG]  36.45,56.9 0 top
U$67  [GND0]  13.11,53.34 0 bottom
U$68  [GATOR#LOG0]  33.15,60.71 0 bottom
U$69  [TIMESTAMP0]  15.62,74.55 90 top
U$70  [PWR-()-03]  67.08,72.95 0 top
U$71  [STAT0]  67.06,63.5 0 top
U$72  [3V33]  57.1,53.34 0 top
U$73  [GND0]  46.84,53.34 0 top
U$74  [3V33]  61.77,75.69 180 top
U$75  [SDA1]  67.31,53.34 0 top
U$76  [SCL2]  77.6,53.34 0 top
U$77  [SCL2]  82.04,75.69 180 top
U$78  [SDA1]  71.88,75.69 180 top
U$79  [GND0]  51.71,75.69 180 top
U$80  [GND0]  46.84,75.69 180 bottom
U$81  [3V33]  57.1,75.69 180 bottom
U$82  [SDA1]  67.18,75.69 180 bottom
U$83  [SCL2]  77.6,75.69 180 bottom
U$84  [3V33]  61.77,53.34 0 bottom
U$85  [SDA1]  72.01,53.34 0 bottom
U$86  [SCL2]  82.04,53.34 0 bottom
U$87  [GATORBIT_FINAL_FOR_SILK#01#PNG]  64.52,56.9 0 bottom
U$88  [GATOR#LOG3]  70.87,59.44 0 top
U$89  [GATORBIT_FINAL_FOR_SILK#01#PNG]  75.06,56.9 0 top
U$90  [GND0]  51.71,53.34 0 bottom
U$91  [GATOR#LOG0]  71.76,60.71 0 bottom
U$92  [TIMESTAMP0]  54.23,74.55 90 top
U$93  [PWR-()-03]  28.47,111.56 0 top
U$94  [STAT0]  28.45,102.11 0 top
U$95  [3V33]  18.49,91.95 0 top
U$96  [GND0]  8.23,91.95 0 top
U$97  [3V33]  23.16,114.3 180 top
U$98  [SDA1]  28.7,91.95 0 top
U$99  [SCL2]  38.99,91.95 0 top
U$100  [SCL2]  43.43,114.3 180 top
U$101  [SDA1]  33.27,114.3 180 top
U$102  [GND0]  13.11,114.3 180 top
U$103  [GND0]  8.23,114.3 180 bottom
U$104  [3V33]  18.49,114.3 180 bottom
U$105  [SDA1]  28.57,114.3 180 bottom
U$106  [SCL2]  38.99,114.3 180 bottom
U$107  [3V33]  23.16,91.95 0 bottom
U$108  [SDA1]  33.4,91.95 0 bottom
U$109  [SCL2]  43.43,91.95 0 bottom
U$110  [GATORBIT_FINAL_FOR_SILK#01#PNG]  25.91,95.5 0 bottom
U$111  [GATOR#LOG3]  32.26,98.04 0 top
U$112  [GATORBIT_FINAL_FOR_SILK#01#PNG]  36.45,95.5 0 top
U$113  [GND0]  13.11,91.95 0 bottom
U$114  [GATOR#LOG0]  33.15,99.31 0 bottom
U$115  [TIMESTAMP0]  15.62,113.16 90 top
U$116  [PWR-()-03]  67.08,111.56 0 top
U$117  [STAT0]  67.06,102.11 0 top
U$118  [3V33]  57.1,91.95 0 top
U$119  [GND0]  46.84,91.95 0 top
U$120  [3V33]  61.77,114.3 180 top
U$121  [SDA1]  67.31,91.95 0 top
U$122  [SCL2]  77.6,91.95 0 top
U$123  [SCL2]  82.04,114.3 180 top
U$124  [SDA1]  71.88,114.3 180 top
U$125  [GND0]  51.71,114.3 180 top
U$126  [GND0]  46.84,114.3 180 bottom
U$127  [3V33]  57.1,114.3 180 bottom
U$128  [SDA1]  67.18,114.3 180 bottom
U$129  [SCL2]  77.6,114.3 180 bottom
U$130  [3V33]  61.77,91.95 0 bottom
U$131  [SDA1]  72.01,91.95 0 bottom
U$132  [SCL2]  82.04,91.95 0 bottom
U$133  [GATORBIT_FINAL_FOR_SILK#01#PNG]  64.52,95.5 0 bottom
U$134  [GATOR#LOG3]  70.87,98.04 0 top
U$135  [GATORBIT_FINAL_FOR_SILK#01#PNG]  75.06,95.5 0 top
U$136  [GND0]  51.71,91.95 0 bottom
U$137  [GATOR#LOG0]  71.76,99.31 0 bottom
U$138  [TIMESTAMP0]  54.23,113.16 90 top
U$139  [PWR-()-03]  28.47,150.16 0 top
U$140  [STAT0]  28.45,140.72 0 top
U$141  [3V33]  18.49,130.56 0 top
U$142  [GND0]  8.23,130.56 0 top
U$143  [3V33]  23.16,152.91 180 top
U$144  [SDA1]  28.7,130.56 0 top
U$145  [SCL2]  38.99,130.56 0 top
U$146  [SCL2]  43.43,152.91 180 top
U$147  [SDA1]  33.27,152.91 180 top
U$148  [GND0]  13.11,152.91 180 top
U$149  [GND0]  8.23,152.91 180 bottom
U$150  [3V33]  18.49,152.91 180 bottom
U$151  [SDA1]  28.57,152.91 180 bottom
U$152  [SCL2]  38.99,152.91 180 bottom
U$153  [3V33]  23.16,130.56 0 bottom
U$154  [SDA1]  33.4,130.56 0 bottom
U$155  [SCL2]  43.43,130.56 0 bottom
U$156  [GATORBIT_FINAL_FOR_SILK#01#PNG]  25.91,134.11 0 bottom
U$157  [GATOR#LOG3]  32.26,136.65 0 top
U$158  [GATORBIT_FINAL_FOR_SILK#01#PNG]  36.45,134.11 0 top
U$159  [GND0]  13.11,130.56 0 bottom
U$160  [GATOR#LOG0]  33.15,137.92 0 bottom
U$161  [TIMESTAMP0]  15.62,151.77 90 top
U$162  [PWR-()-03]  67.08,150.16 0 top
U$163  [STAT0]  67.06,140.72 0 top
U$164  [3V33]  57.1,130.56 0 top
U$165  [GND0]  46.84,130.56 0 top
U$166  [3V33]  61.77,152.91 180 top
U$167  [SDA1]  67.31,130.56 0 top
U$168  [SCL2]  77.6,130.56 0 top
U$169  [SCL2]  82.04,152.91 180 top
U$170  [SDA1]  71.88,152.91 180 top
U$171  [GND0]  51.71,152.91 180 top
U$172  [GND0]  46.84,152.91 180 bottom
U$173  [3V33]  57.1,152.91 180 bottom
U$174  [SDA1]  67.18,152.91 180 bottom
U$175  [SCL2]  77.6,152.91 180 bottom
U$176  [3V33]  61.77,130.56 0 bottom
U$177  [SDA1]  72.01,130.56 0 bottom
U$178  [SCL2]  82.04,130.56 0 bottom
U$179  [GATORBIT_FINAL_FOR_SILK#01#PNG]  64.52,134.11 0 bottom
U$180  [GATOR#LOG3]  70.87,136.65 0 top
U$181  [GATORBIT_FINAL_FOR_SILK#01#PNG]  75.06,134.11 0 top
U$182  [GND0]  51.71,130.56 0 bottom
U$183  [GATOR#LOG0]  71.76,137.92 0 bottom
U$184  [TIMESTAMP0]  54.23,151.77 90 top

## Library data of the parts
BT1-BT8 = SparkFun-Batteries; PROD_ID: BATT-14267
C1 C6 C10 C14 C18 C22 C26 C30 = SparkFun-Capacitors; PROD_ID: CAP-08280
C2-C5 C7-C9 C11-C13 C15-C17 C19-C21 C23-C25 C27-C29 C31 C32 = SparkFun-Capacitors; PROD_ID: CAP-00810
D1 D7 D12 D17 D22 D27 D32 D37 = SparkFun-LED; PROD_ID: DIO-00819
D2 D4 D5 D8-D10 D13-D15 D18-D20 D23-D25 D28-D30 D33-D35 D38-D40 = SparkFun-DiscreteSemi; PROD_ID: DIO-08199
D3 D6 D11 D16 D21 D26 D31 D36 = SparkFun-LED; PROD_ID: DIO-00821
E$1 E$2 FID1-FID32 LOGO1-LOGO24 = SparkFun-Aesthetics
E$3 = SparkFun-Retired
J1 J12 J22 J32 J42 J52 J62 J72 = SparkFun-Connectors; PROD_ID: CONN-07820
J2-J11 J13-J21 J23-J31 J33-J41 J43-J51 J53-J61 J63-J71 J73-J80 = SparkFun-Connectors
Q1 Q3 Q5 Q7 Q9 Q11 Q13 Q15 = SparkFun-FreqCtrl; PROD_ID: XTAL-08900
Q2 Q4 Q6 Q8 Q10 Q12 Q14 Q16 = SparkFun-DiscreteSemi; PROD_ID: TRANS-11308
R1 R13 R23 R33 R43 R53 R63 R73 = SparkFun-Resistors; PROD_ID: RES-07856; VALUE: 1K
R2-R5 R8-R11 R14-R17 R19-R21 R24-R27 R29-R31 R34-R37 R39-R41 R44-R47 R49-R51 R54-R57 R59-R61 R64-R67 R69-R71 R74-R77 R79 R80 = SparkFun-Resistors; PROD_ID: RES-00824
R6 R12 R22 R32 R42 R52 R62 R72 = SparkFun-Resistors; PROD_ID: RES-00818
R7 R18 R28 R38 R48 R58 R68 R78 = SparkFun-Resistors; PROD_ID: RES-07869
S1-S8 = SparkFun-Switches; PROD_ID: SWCH-14139
U1 U2 U5 U7 U9 U11 U13 U15 = SparkFun-IC-Microcontroller; PROD_ID: IC-09069
U3 U4 U6 U8 U10 U12 U14 U16 = SparkFun-Clocks; PROD_ID: IC-14378
U$1-U$7 U$10-U$16 U$18 U$23 U$26-U$40 U$44 U$49-U$63 U$67 U$72-U$86 U$90 U$95-U$109 U$113 U$118-U$132 U$136 U$141-U$155 U$159 U$164-U$178 U$182 = buzzard_labels
U$8 U$21 U$41 U$43 U$64 U$66 U$87 U$89 U$110 U$112 U$133 U$135 U$156 U$158 U$179 U$181 = GatorBit_Final_for_Silk#01#png (3)
U$9 U$22 U$47 U$70 U$93 U$116 U$139 U$162 = Labels
U$17 U$25 U$48 U$71 U$94 U$117 U$140 U$163 = buzzard_labels (13)
U$19 U$46 U$69 U$92 U$115 U$138 U$161 U$184 = buzzard_labels (18)
U$20 U$42 U$65 U$88 U$111 U$134 U$157 U$180 = buzzard_labels (4)
U$24 U$45 U$68 U$91 U$114 U$137 U$160 U$183 = buzzard_labels (17)

## Nets
3.3V: C1.1 C3.1 C4.1 D2.C J1.VCC J5.2 Q2.2 R1.1 R2.2 R3.2 R4.2 R5.2 R9.2 U2.4 U2.6 U2.18 U2.20 U3.7
3.3V1: C5.1 C6.1 C8.1 D8.C J11.2 J12.VCC Q4.2 R11.2 R13.1 R14.2 R15.2 R16.2 R20.2 U1.4 U1.6 U1.18 U1.20 U4.7
3.3V2: C9.1 C10.1 C12.1 D13.C J21.2 J22.VCC Q6.2 R21.2 R23.1 R24.2 R25.2 R26.2 R30.2 U5.4 U5.6 U5.18 U5.20 U6.7
3.3V3: C13.1 C14.1 C16.1 D18.C J31.2 J32.VCC Q8.2 R31.2 R33.1 R34.2 R35.2 R36.2 R40.2 U7.4 U7.6 U7.18 U7.20 U8.7
3.3V4: C17.1 C18.1 C20.1 D23.C J41.2 J42.VCC Q10.2 R41.2 R43.1 R44.2 R45.2 R46.2 R50.2 U9.4 U9.6 U9.18 U9.20 U10.7
3.3V5: C21.1 C22.1 C24.1 D28.C J51.2 J52.VCC Q12.2 R51.2 R53.1 R54.2 R55.2 R56.2 R60.2 U11.4 U11.6 U11.18 U11.20 U12.7
3.3V6: C25.1 C26.1 C28.1 D33.C J61.2 J62.VCC Q14.2 R61.2 R63.1 R64.2 R65.2 R66.2 R70.2 U13.4 U13.6 U13.18 U13.20 U14.7
3.3V7: C29.1 C30.1 C32.1 D38.C J71.2 J72.VCC Q16.2 R71.2 R73.1 R74.2 R75.2 R76.2 R80.2 U15.4 U15.6 U15.18 U15.20 U16.7
!RST: R10.1 U3.2
!RST1: R17.1 U4.2
!RST2: R27.1 U6.2
!RST3: R37.1 U8.2
!RST4: R47.1 U10.2
!RST5: R57.1 U12.2
!RST6: R67.1 U14.2
!RST7: R77.1 U16.2
ADDR: U2.1
ADDR1: U1.1
ADDR2: U5.1
ADDR3: U7.1
ADDR4: U9.1
ADDR5: U11.1
ADDR6: U13.1
ADDR7: U15.1
CS: J1.CS R3.1 U2.14
CS1: J12.CS R16.1 U1.14
CS2: J22.CS R26.1 U5.14
CS3: J32.CS R36.1 U7.14
CS4: J42.CS R46.1 U9.14
CS5: J52.CS R56.1 U11.14
CS6: J62.CS R66.1 U13.14
CS7: J72.CS R76.1 U15.14
GND [vcc]: BT1.- C1.2 C2.2 C3.2 C4.2 D1.C D3.C D4.A D5.A J1.GND J5.6 J6.P$2 J10.P$2 Q1.2 R8.1 S2.3 S2.4 U2.3 U2.5 U2.21 U3.5
GND1 [vcc]: BT2.- C5.2 C6.2 C7.2 C8.2 D6.C D7.C D9.A D10.A J11.6 J12.GND J16.P$2 J20.P$2 Q3.2 R19.1 S1.3 S1.4 U1.3 U1.5 U1.21 U4.5
GND2 [vcc]: BT3.- C9.2 C10.2 C11.2 C12.2 D11.C D12.C D14.A D15.A J21.6 J22.GND J26.P$2 J30.P$2 Q5.2 R29.1 S3.3 S3.4 U5.3 U5.5 U5.21 U6.5
GND3 [vcc]: BT4.- C13.2 C14.2 C15.2 C16.2 D16.C D17.C D19.A D20.A J31.6 J32.GND J36.P$2 J40.P$2 Q7.2 R39.1 S4.3 S4.4 U7.3 U7.5 U7.21 U8.5
GND4 [vcc]: BT5.- C17.2 C18.2 C19.2 C20.2 D21.C D22.C D24.A D25.A J41.6 J42.GND J46.P$2 J50.P$2 Q9.2 R49.1 S5.3 S5.4 U9.3 U9.5 U9.21 U10.5
GND5 [vcc]: BT6.- C21.2 C22.2 C23.2 C24.2 D26.C D27.C D29.A D30.A J51.6 J52.GND J56.P$2 J60.P$2 Q11.2 R59.1 S6.3 S6.4 U11.3 U11.5 U11.21 U12.5
GND6 [vcc]: BT7.- C25.2 C26.2 C27.2 C28.2 D31.C D32.C D34.A D35.A J61.6 J62.GND J66.P$2 J70.P$2 Q13.2 R69.1 S7.3 S7.4 U13.3 U13.5 U13.21 U14.5
GND7 [vcc]: BT8.- C29.2 C30.2 C31.2 C32.2 D36.C D37.C D39.A D40.A J71.6 J72.GND J76.P$2 J80.P$2 Q15.2 R79.1 S8.3 S8.4 U15.3 U15.5 U15.21 U16.5
MISO: J1.DO J5.1 U2.16
MISO1: J11.1 J12.DO U1.16
MISO2: J21.1 J22.DO U5.16
MISO3: J31.1 J32.DO U7.16
MISO4: J41.1 J42.DO U9.16
MISO5: J51.1 J52.DO U11.16
MISO6: J61.1 J62.DO U13.16
MISO7: J71.1 J72.DO U15.16
MOSI: J1.DI J5.4 U2.15
MOSI1: J11.4 J12.DI U1.15
MOSI2: J21.4 J22.DI U5.15
MOSI3: J31.4 J32.DI U7.15
MOSI4: J41.4 J42.DI U9.15
MOSI5: J51.4 J52.DI U11.15
MOSI6: J61.4 J62.DI U13.15
MOSI7: J71.4 J72.DI U15.15
N$1: Q1.1 U2.8
N$2: Q1.3 U2.7
N$3: D1.A R1.2
N$4: D6.A R12.2
N$5: J4.P$2 J9.P$2 Q2.3
N$6: D2.A Q2.1 R8.2
N$7: D3.A R6.2
N$8: R9.1 S2.1 S2.2 U3.8
N$9: Q3.1 U1.8
N$10: Q3.3 U1.7
N$11: D7.A R13.2
N$12: J15.P$2 J19.P$2 Q4.3
N$13: D8.A Q4.1 R19.2
N$14: R20.1 S1.1 S1.2 U4.8
N$15: D11.A R22.2
N$16: Q5.1 U5.8
N$17: Q5.3 U5.7
N$18: D12.A R23.2
N$19: J25.P$2 J29.P$2 Q6.3
N$20: D13.A Q6.1 R29.2
N$21: R30.1 S3.1 S3.2 U6.8
N$22: D16.A R32.2
N$23: Q7.1 U7.8
N$24: Q7.3 U7.7
N$25: D17.A R33.2
N$26: J35.P$2 J39.P$2 Q8.3
N$27: D18.A Q8.1 R39.2
N$28: R40.1 S4.1 S4.2 U8.8
N$29: D21.A R42.2
N$30: Q9.1 U9.8
N$31: Q9.3 U9.7
N$32: D22.A R43.2
N$33: J45.P$2 J49.P$2 Q10.3
N$34: D23.A Q10.1 R49.2
N$35: R50.1 S5.1 S5.2 U10.8
N$36: D26.A R52.2
N$37: Q11.1 U11.8
N$38: Q11.3 U11.7
N$39: D27.A R53.2
N$40: J55.P$2 J59.P$2 Q12.3
N$41: D28.A Q12.1 R59.2
N$42: R60.1 S6.1 S6.2 U12.8
N$43: D31.A R62.2
N$44: Q13.1 U13.8
N$45: Q13.3 U13.7
N$46: D32.A R63.2
N$47: J65.P$2 J69.P$2 Q14.3
N$48: D33.A Q14.1 R69.2
N$49: R70.1 S7.1 S7.2 U14.8
N$50: D36.A R72.2
N$51: Q15.1 U15.8
N$52: Q15.3 U15.7
N$53: D37.A R73.2
N$54: J75.P$2 J79.P$2 Q16.3
N$55: D38.A Q16.1 R79.2
N$56: R80.1 S8.1 S8.2 U16.8
RST: J5.5 R2.1 U2.29
RST1: J11.5 R11.1 U1.29
RST2: J21.5 R21.1 U5.29
RST3: J31.5 R31.1 U7.29
RST4: J41.5 R41.1 U9.29
RST5: J51.5 R51.1 U11.29
RST6: J61.5 R61.1 U13.29
RST7: J71.5 R71.1 U15.29
RXI: U2.30
RXI1: U1.30
RXI2: U5.30
RXI3: U7.30
RXI4: U9.30
RXI5: U11.30
RXI6: U13.30
RXI7: U15.30
SCK: J1.SCLK J5.3 R6.1 U2.17
SCK1: J11.3 J12.SCLK R12.1 U1.17
SCK2: J21.3 J22.SCLK R22.1 U5.17
SCK3: J31.3 J32.SCLK R32.1 U7.17
SCK4: J41.3 J42.SCLK R42.1 U9.17
SCK5: J51.3 J52.SCLK R52.1 U11.17
SCK6: J61.3 J62.SCLK R62.1 U13.17
SCK7: J71.3 J72.SCLK R72.1 U15.17
SCL: D5.C J2.P$2 J7.P$2 R4.1 U2.28 U3.3
SCL1: D10.C J13.P$2 J17.P$2 R14.1 U1.28 U4.3
SCL2: D15.C J23.P$2 J27.P$2 R24.1 U5.28 U6.3
SCL3: D20.C J33.P$2 J37.P$2 R34.1 U7.28 U8.3
SCL4: D25.C J43.P$2 J47.P$2 R44.1 U9.28 U10.3
SCL5: D30.C J53.P$2 J57.P$2 R54.1 U11.28 U12.3
SCL6: D35.C J63.P$2 J67.P$2 R64.1 U13.28 U14.3
SCL7: D40.C J73.P$2 J77.P$2 R74.1 U15.28 U16.3
SDA: D4.C J3.P$2 J8.P$2 R5.1 U2.27 U3.4
SDA1: D9.C J14.P$2 J18.P$2 R15.1 U1.27 U4.4
SDA2: D14.C J24.P$2 J28.P$2 R25.1 U5.27 U6.4
SDA3: D19.C J34.P$2 J38.P$2 R35.1 U7.27 U8.4
SDA4: D24.C J44.P$2 J48.P$2 R45.1 U9.27 U10.4
SDA5: D29.C J54.P$2 J58.P$2 R55.1 U11.27 U12.4
SDA6: D34.C J64.P$2 J68.P$2 R65.1 U13.27 U14.4
SDA7: D39.C J74.P$2 J78.P$2 R75.1 U15.27 U16.4
TXO: U2.31
TXO1: U1.31
TXO2: U5.31
TXO3: U7.31
TXO4: U9.31
TXO5: U11.31
TXO6: U13.31
TXO7: U15.31
V_BATT: BT1.+ R7.2 R10.2
V_BATT1: BT2.+ R17.2 R18.2
V_BATT2: BT3.+ R27.2 R28.2
V_BATT3: BT4.+ R37.2 R38.2
V_BATT4: BT5.+ R47.2 R48.2
V_BATT5: BT6.+ R57.2 R58.2
V_BATT6: BT7.+ R67.2 R68.2
V_BATT7: BT8.+ R77.2 R78.2
VBACKUP: C2.1 R7.1 U3.6
VBACKUP1: C7.1 R18.1 U4.6
VBACKUP2: C11.1 R28.1 U6.6
VBACKUP3: C15.1 R38.1 U8.6
VBACKUP4: C19.1 R48.1 U10.6
VBACKUP5: C23.1 R58.1 U12.6
VBACKUP6: C27.1 R68.1 U14.6
VBACKUP7: C31.1 R78.1 U16.6